# Altium PCB ControleSTM.PcbDoc (part 1 of 3)
Units mm, origin at the board's own origin, x right, y up, seen from the top; angles counter-clockwise.
Board outline 69.32 x 31.88 mm, 2 copper layers (Top Layer, Bottom Layer); 62 components, 48 nets, 242 pads, 79 vias.
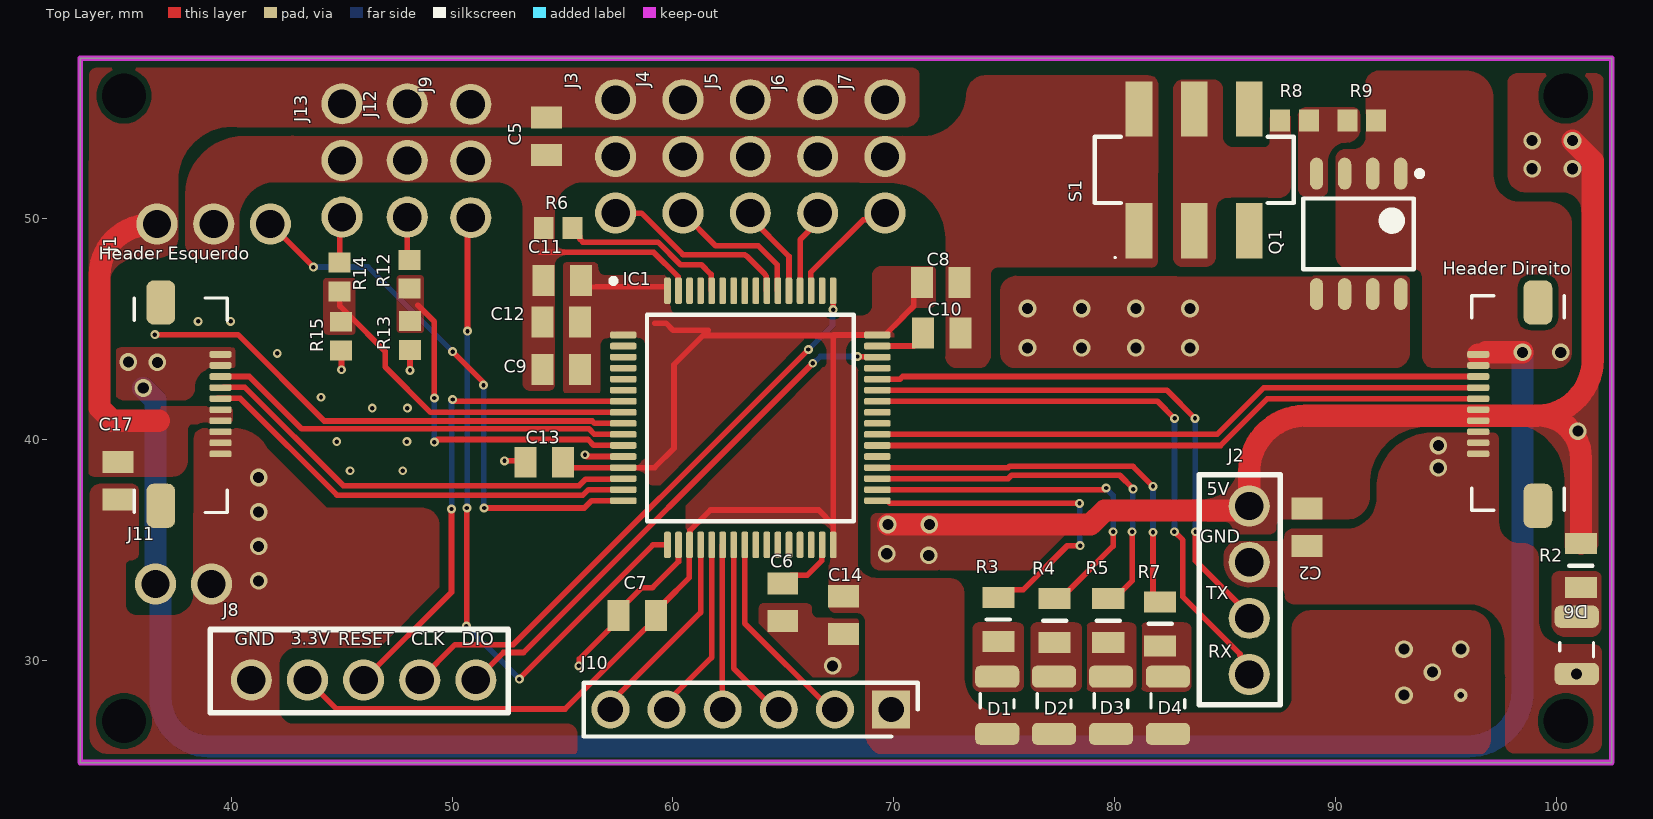
[diagram p0: Top Layer view]
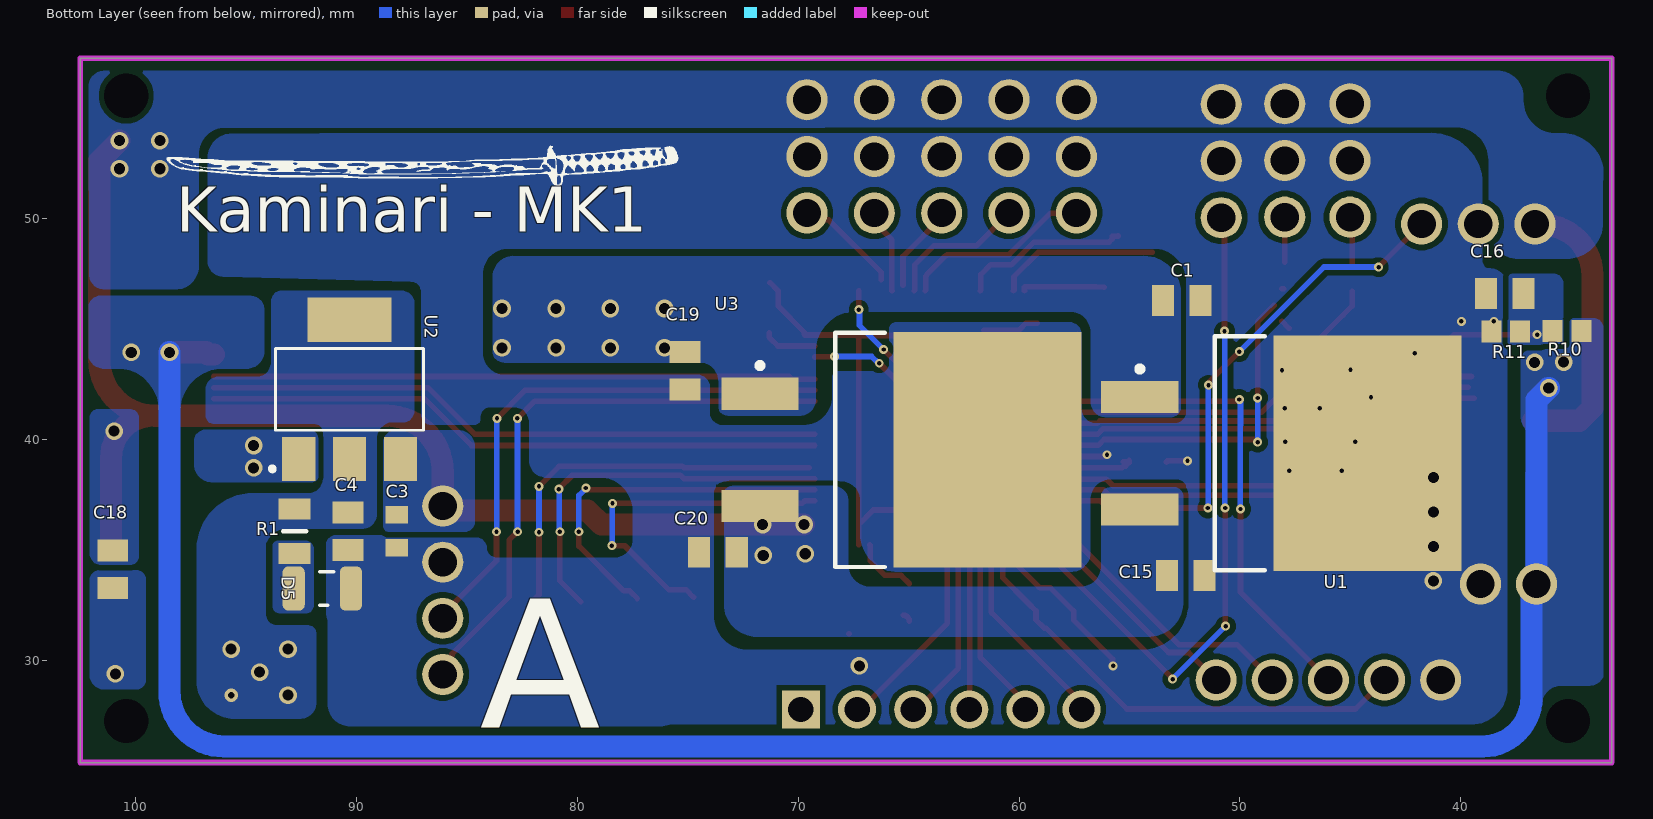
[diagram p1: Bottom Layer view, seen from below]
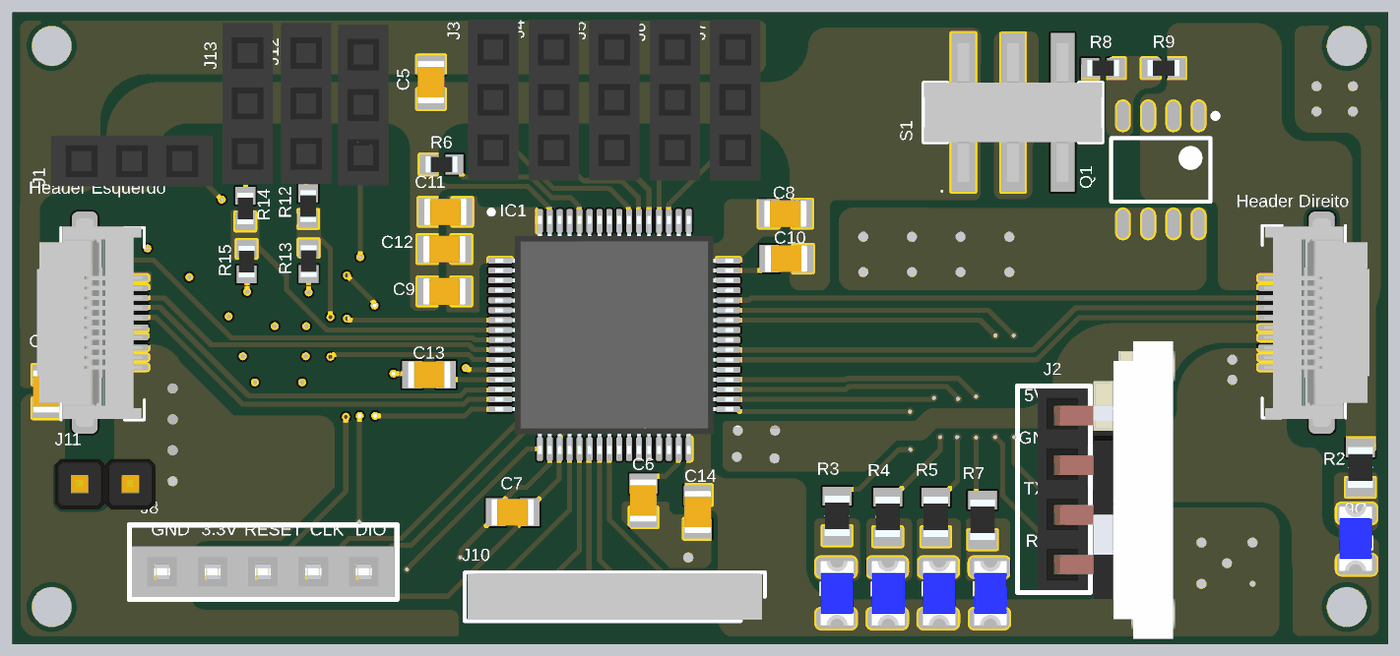
[diagram p3: 3D render of the assembled board from above, using the file's embedded part models]
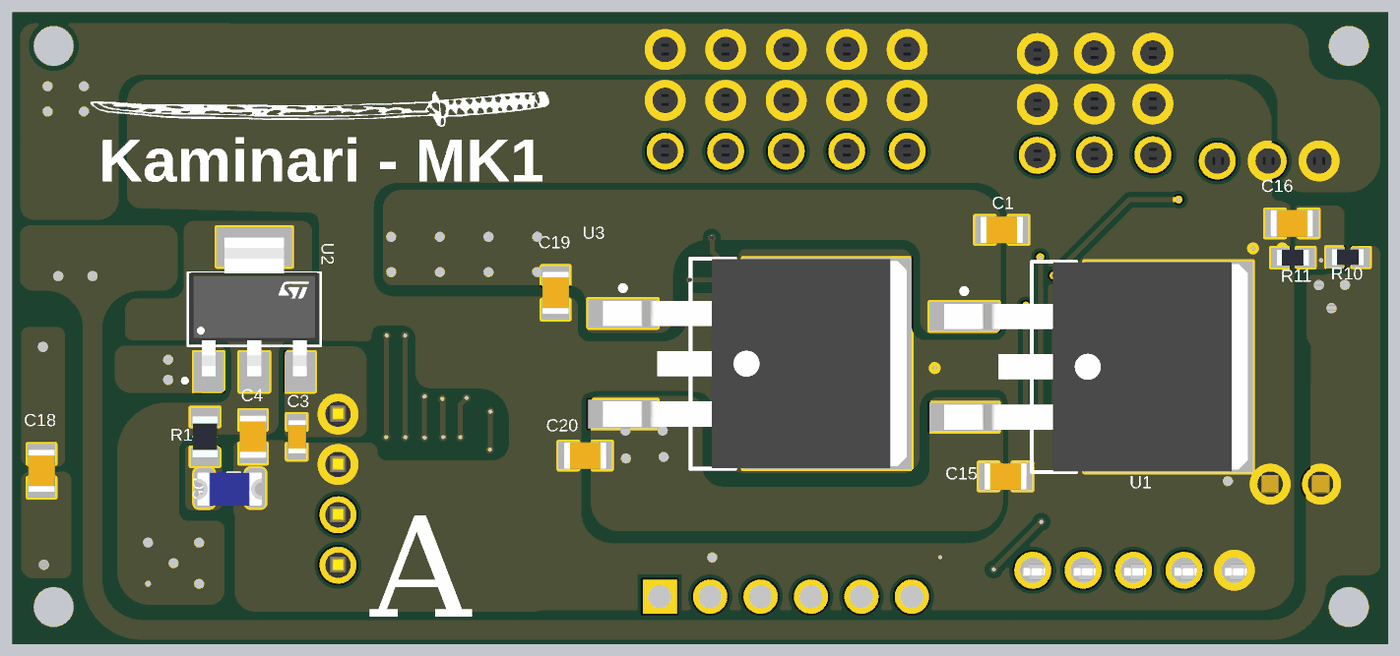
[diagram p4: 3D render of the assembled board from below, using the file's embedded part models]

## Layer stack, top to bottom
Top Solder: solder mask 0.0102, Solder Resist, Dk 3.5
Top Layer: signal copper 0.0356
Dielectric 1: dielectric 0.32, FR-4, Dk 4.8
Bottom Layer: signal copper 0.0356
Bottom Solder: solder mask 0.0102, Solder Resist, Dk 3.5

## Board outline
33.172,25.4 102.489,25.4 102.489,57.277 33.172,57.277

## Design rules (kind name [scope] priority, off if disabled: settings)
Clearance [All] p1: gap=0.254 ignorepadtopadclearanceinfootprint=TRUE except(0: Arc-Hole Track-Hole SMDPad-Hole THPad-Hole Via-Hole Fill-Hole Poly-Hole Region-Hole Text-Hole; 0.1: Arc-Arc Arc-Track Arc-SMDPad Track-Track Track-SMDPad SMDPad-SMDPad)
Height [All] p1: minheight=0 maxheight=1000 prefheight=0
PolygonConnect [All] p1: connectstyle=Direct reliefconductorwidth=0.254 reliefentries=4 polygonreliefangle="90 Angle" airgapwidth=0.254
RoutingVias [All] p1: holewidth=0.711 width=1.27 viastyle="Through Hole" minholewidth=0.711 minwidth=1.27 maxholewidth=0.711 maxwidth=1.27
SolderMaskExpansion [All] p1: expansion=0.102 istentingtop=FALSE
Width [All] p1: maxlimit=1 minlimit=0.254 preferedwidth=0.254 minimp=50.000000 maximp=50.000000 favimp=50.000000
29 further rules are at their usual default settings.

## Classes and differential pairs
component class FontesLineares: C1 C2 C3 C4 C19 C20 D5 D6 Q1 R1 R2 R8 R9 S1 U1 U2 U3
component class controleSTM: C5 C6 C7 C8 C9 C10 C11 C12 C13 C14 C15 C16 C17 C18 D1 D2 D3 D4 "Header Direito" "Header Esquerdo" IC1 J1 J2 J3 J4 J5 J6 J7 J8 J9 J10 J11 J12 J13 R3 R4 R5 R6 R7 R10 R11 R12 R13 R14 R15

## Components (designator, comment, footprint, x,y, rotation, side; value= is the part's Value field where it differs from the comment)
C1 "0.33 uF" C0805 52.641,46.296 r0 bottom
C2 "0.1uF" C0805 88.692,36.05 r90 top
C3 "1uF" C0603 88.181,35.878 r90 bottom
C4 "4.7 uF" C0805 90.373,35.865 r90 bottom
C5 "0.1uF" C0805 54.275,53.75 r270 top
C6 "2.2 uF" C0805 64.975,32.65 r270 top
C7 "0.1uF" C0805 58.381,32.066 r0 top
C8 "0.1uF" C0805 72.122,47.109 r180 top
C9 "4.7 uF" C0805 54.94,43.205 r0 top
C10 "2.2 uF" C0805 72.161,44.856 r0 top
C11 "0.1uF" C0805 54.991,47.219 r0 top
C12 "0.1uF" C0805 54.94,45.339 r0 top
C13 "0.1uF" C0805 54.175,39 r0 top
C14 "0.1uF" C0805 67.7,32.075 r90 top
C15 "0.1uF" C0805 52.451,33.858 r0 bottom
C16 "100 nF" C0805 38.024,46.634 r180 bottom
C17 "4.7 uF" C0805 34.9,38.15 r270 top
C18 "4.7 uF" C0805 101.025,34.15 r90 bottom
C19 "0.33 uF" C0805 75.125,43.125 r90 bottom
C20 "0.1uF" C0805 73.625,34.925 r180 bottom
D1 "Blue" DIODO_2-SMD-3215 74.675,28 r270 top
D2 "Blue" DIODO_2-SMD-3215 77.25,28 r270 top
D3 "Blue" DIODO_2-SMD-3215 79.825,28 r270 top
D4 "Blue" DIODO_2-SMD-3215 82.4,28 r270 top
D5 "Blue" DIODO_2-SMD-3215 91.525,33.275 r0 bottom
D6 "Blue" DIODO_2-SMD-3215 100.9,30.7 r90 top
"Header Direito" "505278-1033" FPC_CON 98.044,41.62 r90 top
"Header Esquerdo" "505278-1033" FPC_CON 37.922,41.62 r270 top
IC1 "STM32F405RGT6" LQFP-64 63.5,41 r0 top
J1 "Female Header 3" "FEMALE HEADER 3" 36.65,49.775 r0 top
J2 "Bluetooth" BLUETOOTH 86.081,37.008 r270 top
J3 "Female Header 3" "FEMALE HEADER 3" 57.404,55.397 r270 top
J4 "Female Header 3" "FEMALE HEADER 3" 60.452,55.397 r270 top
J5 "Female Header 3" "FEMALE HEADER 3" 63.5,55.397 r270 top
J6 "Female Header 3" "FEMALE HEADER 3" 66.548,55.397 r270 top
J7 "Female Header 3" "FEMALE HEADER 3" 69.596,55.397 r270 top
J8 "STM Bootloader" "STM BOOTLOADER" 51.079,29.134 r180 top
J9 "Female Header 3" "FEMALE HEADER 3" 50.85,50.06 r90 top
J10 "Male Header 6" "MALE HEADER 6" 69.87,27.8 r180 top
J11 "Male Header 2" "MALE HEADER 2" 36.576,33.477 r0 top
J12 "Female Header 3" "FEMALE HEADER 3" 47.975,55.215 r270 top
J13 "Female Header 3" "FEMALE HEADER 3" 45.025,55.215 r270 top
Q1 "FDS6576" SOIC-8 91.034,49.327 r270 top
R1 "100R" RESISTOR_0805 92.786,35.865 r90 bottom
R2 "470R" RESISTOR_0805 101.092,34.315 r90 top
R3 "100R" RESISTOR_0805 74.725,31.875 r90 top
R4 "100R" RESISTOR_0805 77.275,31.825 r90 top
R5 "100R" RESISTOR_0805 79.7,31.825 r90 top
R6 "10kR" RESISTOR_0603 54.8,49.6 r180 top
R7 "100R" RESISTOR_0805 82.05,31.675 r90 top
R8 "10kR" RESISTOR_0603 88.128,54.458 r0 top
R9 "10kR" RESISTOR_0603 91.176,54.458 r180 top
R10 "10kR" RESISTOR_0603 35.2,44.925 r180 bottom
R11 "3.3kR" RESISTOR_0603 37.975,44.9 r180 bottom
R12 "10 kOhm" RESISTOR_0603 48.075,47.5 r90 top
R13 "20 kOhm" RESISTOR_0603 48.1,44.725 r90 top
R14 "10 kOhm" RESISTOR_0603 44.912,47.375 r90 top
R15 "20 kOhm" RESISTOR_0603 44.975,44.7 r90 top
S1 "JS202011SCQN" DPDT 83.591,52.222 r0 top
U1 "L7805CD2T-TR" D2PAK 48.133,39.395 r180 bottom
U2 "LDL1117S33R" SOT-223-4 90.297,42.291 r180 bottom
U3 "L7805CD2T-TR" D2PAK 65.325,39.55 r180 bottom

## Footprints (in the part's own frame and the unit in brackets; to place one, negate y for a bottom-side part, rotate by r counter-clockwise, add the part's x,y. Pads: shape width x height; smd on the part's side, far side on the other; paste and mask are expansions set on the pad)
BLUETOOTH [mm]
  round 1.86 hole 1.28: GND(2.54,0) RX(7.62,0) TX(5.08,0) VCC(0,0)
  silkscreen extent -1.42,-2.26 8.99,1.4, body extent -3.67,-1.26 11.33,5.67, height 46
C0603 [mm]
  rect 0.8x1 smd: 1(-0.763,-0.018) 2(0.737,-0.018)
  body extent -0.86,-0.49 0.84,0.41, height 0.8
C0805 [mm]
  rect 1x1.4 smd: 1(-0.85,-0.008) 2(0.85,-0.008)
  body extent -1.07,-0.68 1.07,0.67, height 0.9
D2PAK [mm] "D2-PAK, 3-Pads, Body 7,60x8,64mm (max), IPC Medium Density"
  rect 3.5x1.45 smd: 1(-6.4,2.54) 3(-6.4,-2.54)
  rect 8.5x10.65 smd: 2(3.9,0)
  silkscreen extent -6.53,-5.3 -0.75,5.3, body extent -7.41,-5.28 7.89,5.28, height 4.81
DIODO_2-SMD-3215 [mm]
  rrect50% 1x2 smd: A(1.3,0) C(-1.288,-0.001)
  silkscreen extent -0.51,-0.76 0.13,0.76, body extent -1.61,-0.77 1.66,0.87, height 0.9
DPDT [mm]
  rect 1.2x2.5 smd: A1(0,-2.75) A1(0,2.75) A2(-2.5,-2.75) A2(-2.5,2.75) A3(2.5,-2.75) A3(2.5,2.75)
  silkscreen extent -4.5,-4 4.5,1.5, body extent -4.5,-3.5 4.5,3.5, height 5.65
"FEMALE HEADER 3" [mm]
  round 1.86 hole 1.28: PIN1(0,0) PIN2(2.565,0) PIN3(5.13,0)
  body extent -1.52,-1.27 6.6,1.27, height 8.5
FPC_CON [mm] "Small Outline IC (SOIC), 1.27 mm pitch; 8 pin, 4.90 mm L X 3.90 mm W X 1.75 mm H body"
  rrect50% 0.3x1 smd: 1(-2.25,1.6) 2(-1.75,1.6) 3(-1.25,1.6) 4(-0.75,1.6) 5(-0.25,1.6) 6(0.25,1.6) 7(0.75,1.6) 8(1.25,1.6) 9(1.75,1.6) 10(2.25,1.6)
  rrect50% 2x1.3 smd: MP1(-4.6,-1.1) MP2(4.6,-1.1)
  silkscreen extent -4.8,-2.3 4.9,1.9, body extent -5.25,-3.5 5.25,1.8, height 1.88
LQFP-64 [mm]
  rrect50% 1.2x0.3 smd: 1(-5.75,3.75) 2(-5.75,3.25) 3(-5.75,2.75) 4(-5.75,2.25) 5(-5.75,1.75) 6(-5.75,1.25) 7(-5.75,0.75) 8(-5.75,0.25) 9(-5.75,-0.25) 10(-5.75,-0.75) 11(-5.75,-1.25) 12(-5.75,-1.75) 13(-5.75,-2.25) 14(-5.75,-2.75) 15(-5.75,-3.25) 16(-5.75,-3.75) 33(5.75,-3.75) 34(5.75,-3.25) 35(5.75,-2.75) 36(5.75,-2.25) 37(5.75,-1.75) 38(5.75,-1.25) 39(5.75,-0.75) 40(5.75,-0.25) 41(5.75,0.25) 42(5.75,0.75) 43(5.75,1.25) 44(5.75,1.75) 45(5.75,2.25) 46(5.75,2.75) 47(5.75,3.25) 48(5.75,3.75)
  rrect50% 0.3x1.2 smd: 17(-3.75,-5.75) 18(-3.25,-5.75) 19(-2.75,-5.75) 20(-2.25,-5.75) 21(-1.75,-5.75) 22(-1.25,-5.75) 23(-0.75,-5.75) 24(-0.25,-5.75) 25(0.25,-5.75) 26(0.75,-5.75) 27(1.25,-5.75) 28(1.75,-5.75) 29(2.25,-5.75) 30(2.75,-5.75) 31(3.25,-5.75) 32(3.75,-5.75) 49(3.75,5.75) 50(3.25,5.75) 51(2.75,5.75) 52(2.25,5.75) 53(1.75,5.75) 54(1.25,5.75) 55(0.75,5.75) 56(0.25,5.75) 57(-0.25,5.75) 58(-0.75,5.75) 59(-1.25,5.75) 60(-1.75,5.75) 61(-2.25,5.75) 62(-2.75,5.75) 63(-3.25,5.75) 64(-3.75,5.75)
  silkscreen extent -6.3,-4.68 4.68,6.3, body extent -6,-6 6,6, height 1.6
"MALE HEADER 2" [mm]
  round 1.86 hole 1.28: PIN1(0,0) PIN2(2.54,0)
  body extent -1.27,-1.27 3.81,1.27, height 8
"MALE HEADER 6" [mm]
  rect 1.725x1.725 hole 1.15: PIN1(0,0)
  round 1.725 hole 1.15: PIN2(2.54,0) PIN3(5.08,0) PIN4(7.62,0) PIN5(10.16,0) PIN6(12.7,0)
  silkscreen extent -1.21,-1.22 13.91,1.22, body extent -1.07,-1.17 13.77,1.17, height 10.37
RESISTOR_0603 [mm]
  rect 0.9x1 smd: 1(-0.65,0) 2(0.65,0)
  body extent -0.8,-0.4 0.8,0.4, height 0.55
RESISTOR_0805 [mm]
  rect 0.95x1.45 smd: 1(-1,0) 2(1,0)
  silkscreen extent 0,-0.53 0,0.53, body extent -1.02,-0.63 1.02,0.63, height 0.5
SOIC-8 [mm] "SOIC, 8-Leads, Body 4,90x3,90mm, Pitch 1,27mm, IPC Medium Density"
  oval 1.45x0.6 smd: D(2.725,1.905) D(2.725,-0.635) D(2.725,0.635) D(2.725,-1.905) G(-2.725,-1.905) S(-2.725,1.905) S(-2.725,-0.635) S(-2.725,0.635)
  silkscreen extent -2.85,-2.5 1.6,2.88, body extent -2,-2.5 2,2.5, height 1.75
SOT-223-4 [mm]
  rect 1.5x2 smd: 1(-2.3,-3.15) 2(0,-3.15) 3(2.3,-3.15)
  rect 3.8x2 smd: 2(0,3.15)
  silkscreen extent -3.6,-3.7 3.35,1.85, body extent -3.25,-3.38 3.25,3.62, height 1.9
"STM BOOTLOADER" [mm]
  round 1.86 hole 1.28: CLK(2.54,0) DIO(0,0) GND(10.16,0) RESET(5.08,0) VCC(7.62,0)
  silkscreen extent -1.47,-2.29 12.01,1.47, body extent -1.32,-1.19 11.88,1.35, height 8.5

## Part data
C1 C19: library part GCM21BR71E334KA37K, "CAP CER 0.33UF 25V X7R 0805", Manufacturer="Murata Eletronics", Operating Temperature="-55 C ~ 125 C", Package / Case="0805 (2012 Metric)", Supplier Part Number 1=81-GCM21BR71E334KA7K, Tolerance=10%, Voltage - Rated="25 VDC", Category="Ceramic Capacitor", ComponentLink1Description=Datasheet, ComponentLink1URL=https://br.mouser.com/datasheet/2/281/GCM21BR71E334KA37_01-1968656.pdf, ComponentLink2Description="Mouser Link", ComponentLink2URL=https://br.mouser.com/ProductDetail/Murata-Electronics/GCM21BR71E334KA37K?qs=N3Kl9KD794Tg%2FXM5q2uFQQ%3D%3D, ComponentLink3Description=ESR, ComponentLink3URL=https://www.murata.com/en-us/products/productdetail?partno=GCM21BR71E334KA37%23, Dieletric=X7R, Library Control - Checked Footprint=Yes, Library Control - Checked Schematic=Yes, Library Control - Last Update="28/06/2021 00:57", Library Control - Person that Checked Footprint=Nikaum, Library Control - Person that Checked Schematic=Nikaum, Library Control - Person that did the Last Update Footprint=Nikaum, Library Control - Person that did the Last Update Schematic=Nikaum, Library Ref=Capacitor, Part Number=GCM21BR71E334KA37K, Price="1= 0,57, 10= 0,398, 100= 0,239 (USD)", Size / Dimension="2,00 L x 1,25 W x 1,25 H", Supplier 1=Mouser
C2 C5 C7 C8 C11 C12 C13 C14 C15 C20: library part C0805C104M3RACTU, "CAP CER 0.1uF 25V X7R 0805", Manufacturer=Kemet, Operating Temperature="-55 C ~ 125 C", Package / Case="0805(2012 mestric)", Supplier Part Number 1=80-C0805C104M3R, Tolerance=20%, Voltage - Rated="25 VDC", Category="Ceramic Capacitor", ComponentLink1Description=Datasheet, ComponentLink1URL=https://br.mouser.com/datasheet/2/212/KEM_C1002_X7R_SMD-1102033.pdf, ComponentLink2Description="Mouser Link", ComponentLink2URL=https://br.mouser.com/ProductDetail/KEMET/C0805C104M3RACTU?qs=jbCUrP3sAgSIdMuvv9W4Pg%3D%3D, Dieletric=X7R, ESR=-, Library Control - Checked Footprint=No, Library Control - Checked Schematic=Yes, Library Control - Last Update="26/06/2021 20:52", Library Control - Person that Checked Schematic=Guilherme, Library Control - Person that did the Last Update Schematic=Marcos, Library Ref=Capacitor, Part Number=C0805C104M3RACTU, Price="1=0,13 10=0,064 100=0,037 1000=0,025 (USD)", Size / Dimension="1.25 mm W x 2 mm L x 0.78 mm H", Supplier 1=Mouser
C3: library part "Capacitor Model", "CAP CER 1UF 25V X7R 0603", ComponentLink1Description="Mouser Link", ComponentLink2Description=Datasheet
C4 C9 C17 C18: library part GRM219R61E475KA73D, "CAP CER 4.7uF 25V X5R 0805", Manufacturer="MURATA ELECTRONICS", Operating Temperature="-55°C ~ 85°C", Package / Case="0805(2012 metric)", Supplier Part Number 1=81-GRM219R61E475KA73D, Tolerance=10%, Voltage - Rated="25 VDC", Category="Ceramic Capacitors", ComponentLink1Description=Datasheet, ComponentLink1URL=https://br.mouser.com/datasheet/2/281/1/GRM219R61E475KA73_01A-1986363.pdf, ComponentLink2Description="Mouser Link", ComponentLink2URL=https://br.mouser.com/ProductDetail/Murata-Electronics/GRM219R61E475KA73D?qs=%2Fha2pyFadui1540apPxqrcvNL2Od6%2FE9q78FE8iyERiL9ZO4NhnlONCgyc%2FC2rEQ, Dieletric=X5R, ESR=-, Library Control - Checked Footprint=Yes, Library Control - Checked Schematic=Yes, Library Control - Last Update=25/08/22, Library Control - Person that Checked Footprint=Cage, Library Control - Person that Checked Schematic=Cage, Library Control - Person that did the Last Update Footprint=Cage, Library Control - Person that did the Last Update Schematic=Cage, Library Ref=Capacitor, Part Number=GRM219R61E475KA73D, Price="1=0,28 10=0,193 100=0,098 1000=0,059 (USD)", Size / Dimension="2 mm L x 1.25 mm W x 0.85 mm H", Supplier 1=Mouser
C6 C10: library part GCM21BR71C225KA64L, "CAP CER 2.2uF 16V X7R 0805", Manufacturer="MURATA ELECTRONICS", Operating Temperature="-55°C ~125ºC", Package / Case="0805(2012 Metric)", Supplier Part Number 1=81-GCM21BR71C225KA4L, Tolerance=10%, Voltage - Rated="16 VDC", Category="Ceramic capacitor", ComponentLink1Description=Datasheet, ComponentLink1URL=https://br.mouser.com/ProductDetail/Murata-Electronics/GCM21BR71C225KA64L?qs=aEuGZpxfbxV0E5XH%252BwYupA%3D%3D, ComponentLink2Description="Mouser Link", ComponentLink2URL=https://br.mouser.com/ProductDetail/Murata-Electronics/GCM21BR71C225KA64L?qs=aEuGZpxfbxV0E5XH%252BwYupA%3D%3D, Dieletric=X7R, ESR=-, Library Control - Checked Footprint=Yes, Library Control - Checked Schematic=Yes, Library Control - Last Update=25/08/22, Library Control - Person that Checked Footprint=Cage, Library Control - Person that Checked Schematic=Cage, Library Control - Person that did the Last Update Footprint=Cage, Library Control - Person that did the Last Update Schematic=Cage, Library Ref=Capacitor, Part Number=GCM21BR71C225KA64L, Price="1=0,41 10=0,283 100=0,169 1000=0,107 (USD)", Size / Dimension="2 mm L  x 1.25 mm W x 1.25 mm H", Supplier 1=Mouser
C16: library part 885012207128, "CAP CER 100 nF 100V X7R 0805", Manufacturer="Wurth Elektronik", Operating Temperature="-55°C ~125ºC", Package / Case="0805(2012 Metric)", Supplier Part Number 1=710-885012207128, Tolerance=10%, Voltage - Rated="100 VDC", Category="Ceramic capacitor", ComponentLink1Description=Datasheet, ComponentLink1URL=https://br.mouser.com/datasheet/2/445/885012207128-1727772.pdf, ComponentLink2Description="Mouser Link", ComponentLink2URL=https://br.mouser.com/ProductDetail/Wurth-Elektronik/885012207128?qs=MLItCLRbWsys1TnbPEYt%252BQ%3D%3D, Dieletric=X7R, ESR=-, Library Control - Checked Footprint=Yes, Library Control - Checked Schematic=Yes, Library Ref=Capacitor, Part Number=885012207128, Price="1=0,41 10=0,283 100=0,169 1000=0,107 (USD)", Size / Dimension="2 mm L  x 1.25 mm W x 1.25 mm H", Supplier 1=Mouser
D1 D2 D3 D4 D5 D6: library part EAST3215BA5, "LED 75mW BLUE 45MCD 3215", Current - Forward (If)="20 mA", Manufacturer="Everlight Electronics", Max Power Dissipation="75 mW", Operating Temperature="- 40 °C ~ 85 °C", Package / Case=3215, Reverse Voltage="5 V", Supplier Part Number 1=638-EAST3215BA5, Voltage - Forward (Vf)="3,30 V", Category="Standard LEDs - SMD", Color=Blue, ComponentLink1Description="Mouser Link", ComponentLink1URL=https://www.mouser.com/ProductDetail/Everlight/EAST3215BA5?qs=Cqqh%252BS766wnzp9nQVj5A4g==, ComponentLink2Description=Datasheet, ComponentLink2URL=https://www.mouser.com/datasheet/2/143/EAST3215BA5-1154292.pdf, Library Control - Checked Footprint=yes, Library Control - Checked Schematic=yes, Library Control - Last Update="13/06/2021 12:45", Library Control - Person that Checked Footprint=Lucas, Library Control - Person that Checked Schematic=Lucas, Library Control - Person that did the Last Update Footprint="Stéfany (Ster)", Library Control - Person that did the Last Update Schematic="Stéfany (Ster)", Library Ref=Diodo/Led, Luminous Intensity="45 mcd", Max Current Rating="20 mA", Part Number=EAST3215BA5, Price="1 = 0,3800, 10 = 0,2050, 100 = 0.1080 (USD)", Supplier 1=Mouser, Viewing Angle=130°, Wavelength="468 nm"
"Header Direito" "Header Esquerdo": library part 505278-1033_BODY, "CONN FFC/FPC HORZ 10POS 0.50MM", Current Rating (Amps)=500mA, Manufacturer=Molex, Operating Temperature="-40°C ~ 85°C", Supplier Part Number 1=538-505278-1033, Category=Connectors, ComponentLink1Description=Datasheet, ComponentLink1URL=https://br.mouser.com/datasheet/2/276/2/5052781033_FFC_FPC_CONNECTORS-772019.pdf, ComponentLink2Description="Mouser Link", ComponentLink2URL=https://br.mouser.com/ProductDetail/Molex/505278-1033?qs=c8NFF48pVsDStgrQCBOSTg%3D%3D, Contact Length - Mating=0.50mm, Contact Material=Tin, Contact Type=FFC/FPC, Insulation Material="Liquid Crystal Polymer", Library Control - Checked Footprint=Yes, Library Control - Checked Schematic=Yes, Library Control - Last Project that Used=Follow-Final, Library Control - Last Update="24/04/2021 00:25", Library Control - Person that Checked Footprint=Lucas, Library Control - Person that Checked Schematic=Lucas, Library Control - Person that did the Last Update Footprint=Mateus(Dimas), Library Control - Person that did the Last Update Schematic=Mateus(Dimas), Library Ref=Connectors, Mounting Type="Right Angle", Number of Positions=10, Number of Rows=1, Part Number=505278-1033, Pitch=0.50mm, Price="1=0,51000, 10=0,42900, 100=0,33400 (USD)", Supplier 1=Mouser, Termination=SMD
IC1: "IC MCU 32-BIT 192kB FLASH ARM Cortex-M4 168MHz  LQFP-64", Manufacturer=STM, Operating Temperature="-40°C to 85°C", Package/Case=LQFP-64, Supplier Part Number 1=511-STM32F405RGT6, Voltage - Supply (Vcc/Vdd)="1.8 V to 3.6 V", Category="ARM Microcontrollers - MCU", ComponentLink1Description="Mouser Link", ComponentLink1URL=https://www.mouser.com/ProductDetail/STMicroelectronics/STM32F405RGT6?qs=Z8%252BeY1k3TIKgj7QWsYGpQw%3D%3D, ComponentLink2Description="Datasheet Link", ComponentLink2URL=https://www.mouser.com/datasheet/2/389/dm00037051-1797298.pdf, Connectivity=-, Core Processor="ARM Cortex M0+", Library Control - Last Update="22/08/21 15:09", Library Control - Person that did the Last Update Footprint=Marcos, Library Control - Person that did the Last Update Schematic=Marcos, Library Ref=Microcrontrollers, Number of ADC Channels=16, Number of Ethernet Channels=-, Number of I2C Channels=3, Number of I/Os=51, Number of SPI Channels=3, Number of Timers/Counters=17, Number of UART/USART Channels=4, Oscillator Type=Internal, Part Number=STM32F405RGT6, Peripherals="CAN, I2C, SDIO, I2S / SPI, UART / USART, USB", Price="1 = 12,95, 10 = 11,91,  100 = 11,42, 500 = 8,95 (USD)", Program Memory Size=1024kB, Program Memory Type=Flash, RAM Size="192k B", Series=STM32F405RG, Speed=168MHz, Supplier 1=Mouser
J2: library part "Barramento Bluetooth", "BARRAMENTO BLUETOOTH HC-06", Frequency="2,4 GHz", Operating Voltage="3,6 / 6 (V)", Recomended Operating Configuration="5V @ 50mA", Bluetooth Mode="Slave Only", Library Ref=Header, Max Range=10m, Maximum Serial Transmission Rate="9600 bps", Modulation="GFSK (Gaussian Frequency Shift Keying)", Number of Contacts=4
J8: library part "Barramento de Gravação STM", "BARRAMENTO DE GRAVAÇÃO", Library Ref=Header, Number of Contacts=5
Q1: "MOSFET P-CH 20V 11A SOIC-8", Current - Continuous Drain (Id) @25°C=-11A, Drain to Source Voltage (Vds)=-20V, Drive Voltage (Max Rds On, Min Rds On)="-2.5V ~4.5V", Input Capacitance (Ciss) (Max) @Vds=4044pF@-10V, Manufacturer="onsemi / Fairchild", Operating Temperature="-55 °C ~150 °C", Package / Case=SOIC-8, Power Dissipation (Max)=2.5W, Supplier Part Number 1=512-FDS6576, ComponentLink1Description=Datasheet, ComponentLink1URL=https://br.mouser.com/datasheet/2/308/1/FDS6576_D-1808687.pdf, ComponentLink2Description=Mouser, ComponentLink2URL=https://br.mouser.com/ProductDetail/onsemi-Fairchild/FDS6576?qs=FOlmdCx%252BAA1N14vq5QZP7Q%3D%3D, FET Type=P-Channel, Gate Charge (Qg) (Max) @ Vgs=60nC@-4.5V, Library Ref=Mosfet, Part Number=SOIC-8, Price="1=1.34, 10=1.20, 100=0.932, 500=0.77, 1000=0.608 (USD)", Rds On (Max) @ Id, Vgs="23mOhms @ -11A, -4.5V", Rise / Fall Time (Typ)="17 / 79 (ns)", Supplier 1=Mouser, Vgs (Max)=12V, Vgs(th) (Max) Id=-1.5V@-250uA
R1 R3 R4 R5 R7: library part CRCW0805100RFKEA, "RES SMD 100 OHM 1% 1/8W 0805", Manufacturer="Vishay / Dale", Operating Temperature="- 55ºC ~ 155ºC", Package / Case="0805 (2012 Metric)", Power Rating="125 mW (1/8 W)", Resistor Type=Fixo, Supplier Part Number 1=71-CRCW0805-100-E3, Temperature Coefficient="100 PPM / C", Tolerance="1 %", Voltage Rating="150 V", Category="Thick Film Resistors - SMD", ComponentLink1Description="Mouser Link", ComponentLink1URL=https://www.mouser.com/ProductDetail/Vishay-Dale/CRCW0805100RFKEA?qs=sGAEpiMZZMu61qfTUdNhG2DpbjADlD3GxPcNG3UnvYk%3D, ComponentLink2Description="Datasheet Link", ComponentLink2URL=https://www.mouser.com/datasheet/2/427/dcrcwe3-1762152.pdf, Library Control - Checked Footprint=No, Library Control - Checked Schematic=Yes, Library Control - Last Update="20/06/21 16:56", Library Control - Person that Checked Schematic=Marcos, Library Control - Person that did the Last Update Footprint=Dalarme, Library Control - Person that did the Last Update Schematic=Marcos, Library Ref=Resistor, Part Number=CRCW0805100RFKEA, Price="1=0,18, 10=0,065, 100=0,027, 1000=0,012 (USD)", Size / Dimension="2 mm L x  1.25 mm W x  0.45 mm H", Supplier 1=Mouser
R2: library part ERJ-6GEYJ471V, "RES SMD 470 OHM 5% 1/8W 0805", Manufacturer=Panasonic, Operating Temperature="- 55ºC ~ 155ºC", Package / Case="0805 (2012 Metric)", Part Number=667-ERJ-6GEYJ471V, Power Rating="125 mW (1/8 W)", Resistor Type=Fixo, Temperature Coefficient="200 PPM / C", Tolerance="5 %", Voltage Rating="150 V", Category="Thick Film Resistors - SMD", ComponentLink1Description="Datasheet Link", ComponentLink1URL=https://br.mouser.com/datasheet/2/315/AOA0000C301-1488782.pdf, ComponentLink2Description="Mouser Link", ComponentLink2URL=https://www.mouser.com/ProductDetail/Panasonic/ERJ-6GEYJ471V?qs=%2Fha2pyFadujWqMGonbcVXQOcxwQBA8OuqUzw3XmrY6vv5LW7wYDrug%3D%3D, Library Control - Checked Footprint=No, Library Control - Checked Schematic=Yes, Library Control - Last Update="20/06/21 16:06", Library Control - Person that Checked Schematic=Marcos, Library Control - Person that did the Last Update Footprint=Dalarme, Library Control - Person that did the Last Update Schematic=Marcos, Library Ref=Resistor, Price="1=0,1000, 10=0,04300, 100=0,02000 1000 = 0,009(USD)", Size / Dimension="2 mm L x  1.25 mm W x  0.6 mm H", Supplier 1=Mouser, Supplier Part Number 1=667-ERJ-6GEYJ471V
R6 R8 R9 R10: library part RC0603JR-0710KL, "RES SMD 10K OHM 5% 1/10W 0603", Manufacturer=Yageo, Operating Temperature="- 55ºC ~ 155ºC", Package / Case="0603 (1608 Metric)", Power Rating="100 mW (1/10 W)", Resistor Type=Fixo, Supplier Part Number 1=603-RC0603JR-0710KL, Temperature Coefficient="100 PPM / C", Tolerance="5 %", Voltage Rating="75 V", Category="Thick Film Resistors - SMD", ComponentLink1Description="Mouser Link", ComponentLink1URL=https://br.mouser.com/ProductDetail/Yageo/RC0603JR-0710KL?qs=ksOUTF%2FWcd8D6T22BJkQ7g%3D%3D, ComponentLink2Description="Datsheet Link", ComponentLink2URL=https://br.mouser.com/datasheet/2/447/Yageo_03_18_2021_PYu_RC_Group_51_RoHS_L_11-2199992.pdf, Library Control - Checked Footprint=No, Library Control - Checked Schematic=Yes, Library Control - Last Update="21/06/21 14:15", Library Control - Person that Checked Schematic=Marcos, Library Control - Person that did the Last Update Footprint=Dalarme, Library Control - Person that did the Last Update Schematic=Marcos, Library Ref=Resistor, Part Number=RC0603JR-0710KL, Price="1=0,10, 10=0,015, 100=0,005 1000=0,0040 (USD)", Size / Dimension="1.6 mm L x  0.8 mm W x  0.45 mm H", Supplier 1=Mouser
R11: library part CRGCQ0603F3K3, "RES SMD 3.3K OHM 1% 1/10W 0603", Manufacturer="TE Connectivity / Holsworthy", Operating Temperature="- 55ºC ~ 125ºC", Package / Case="0603 (1608 Metric)", Power Rating="100 mW (1/10 W)", Resistor Type=Fixed, Supplier Part Number 1=279-CRGCQ0603F3K3, Temperature Coefficient="100 PPM / C", Tolerance="1 %", Voltage Rating="75 V", Category="Thick Film Resistors", ComponentLink1Description="Mouser Link", ComponentLink1URL=https://br.mouser.com/ProductDetail/TE-Connectivity-Holsworthy/CRGCQ0603F3K3?qs=sGAEpiMZZMvdGkrng054t7z4BkURc4Lz7mzhBruKq8fwVJ16OlxZFQ%3D%3D, ComponentLink2Description=Datasheet, ComponentLink2URL=https://br.mouser.com/datasheet/2/418/4/NG_DS_1773204-3_1-1358553.pdf, Library Control - Checked Footprint=Yes, Library Control - Checked Schematic=Yes, Library Control - Last Update="27/06/2021 20:27", Library Control - Person that Checked Footprint=Nikaum, Library Control - Person that Checked Schematic=Guilherme, Library Control - Person that did the Last Update Footprint=Dalarme, Library Control - Person that did the Last Update Schematic=Dalarme, Library Ref=Resistor, Part Number=CRGCQ0603F3K3, Price="1=0,10, 10=0,029, 100=0,011 (USD)", Size / Dimension="1.6 mm L x  0.8 mm W x  0.45 mm H", Supplier 1=Mouser
R12 R14: library part CRCW060310K0FKEBC, "RES SMD 10 kOHM 1% 1/10W 0603", Manufacturer=Vishay, Operating Temperature="- 55 C~155 C", Package / Case="0603 (1608 metric)", Power Rating="100mW (1/10 W)", Resistor Type=Fixo, Supplier Part Number 1=71-CRCW060310K0FKEBC, Temperature Coefficient="100 PPM / C", Tolerance="1 %", Voltage Rating="75 V", Category="Thick Film Resistors - SMD", ComponentLink1Description="Mouser Link", ComponentLink1URL=https://br.mouser.com/ProductDetail/Vishay-Dale/CRCW060310K0FKEBC?qs=wd5RIQLrsJiqANp9xmDb7A%3D%3D, ComponentLink2Description="Datasheet Link", ComponentLink2URL=https://br.mouser.com/datasheet/2/427/crcwce3-1762584.pdf, Library Ref=Resistor, Part Number=CRCW060310K0FKEBC, Price="1 = 0,10, 10 = 0,032, 100 = 0,013 (USD)", Size / Dimension="1,60 L x 0,80 W x 0,45 H", Supplier 1=Mouser
R13 R15: library part ERJ-3GEYJ203V, "RES SMD 20 kOHM 1% 1/10W 0603", Manufacturer=Panasonic, Operating Temperature="- 55 C~155 C", Package / Case="0603 (1608 metric)", Power Rating="100mW (1/10 W)", Resistor Type=Fixo, Supplier Part Number 1=667-ERJ-3GEYJ203V, Temperature Coefficient="100 PPM / C", Tolerance="5 %", Voltage Rating="75 V", Category="Thick Film Resistors - SMD", ComponentLink1Description="Mouser Link", ComponentLink1URL=https://br.mouser.com/ProductDetail/Panasonic/ERJ-3GEYJ203V?qs=4WZYzuGhm5oR10lJ%252BqFZyQ%3D%3D, ComponentLink2Description="Datasheet Link", ComponentLink2URL=https://br.mouser.com/datasheet/2/315/AOA0000C301-1488782.pdf, Library Ref=Resistor, Part Number=ERJ-3GEYJ203V, Price="1 = 0,10, 10 = 0,032, 100 = 0,013 (USD)", Size / Dimension="1,60 L x 0,80 W x 0,45 H", Supplier 1=Mouser
S1: "DEEP SWITCH 4 POSITIONS", Current Rating="300 mA", Manufacturer=C&K, Mouser Part Number=611-JS202011SCQN, Operating Temperature(max - min)=-20~70°C, Voltage Rating DC="30 VDC", ComponentLink1Description="Mouser Link", ComponentLink1URL=https://br.mouser.com/ProductDetail/CK/JS202011SCQN?qs=LgMIjt8LuD95JYWxZ7NvZA%3D%3D, ComponentLink2Description="Datasheet Link", ComponentLink2URL=https://www.mouser.com/datasheet/2/60/js-1841892.pdf, Library Control - Checked Footprint=Yes, Library Control - Checked Schematic=Yes, Library Control - Last Update=15/06/2021, Library Control - Person that Checked Footprint=Nikaum, Library Control - Person that Checked Schematic=Nikaum, Library Control - Person that did the Last Update Footprint=Nikaum, Library Control - Person that did the Last Update Schematic=Nikaum, Library Ref=Diversos, Part Number=JS202011SCQN, Supplier=Mouser, Switch Function="ON - ON"
U1 U3: "IC REG LINEAR 5V 1A D2PAK", Current - Output=1A, Current - Quiescent (Iq)=8mA, Manufacturer=ST, Max Power Dissipation="Internally Limited", Operating Temperature="-40~125 ºC", Package/ Case=D2PAK, Supplier Part Number 1=511-L7805CD2T-TR, Voltage - Dropout (Max)=2V, Voltage - Input (Max)=35V, Voltage - Output (Max)=5.25V, Voltage - Output (Min/Fixed)=5V, Category="Linear Voltage Regulator", ComponentLink1Description="Mouser Link", ComponentLink1URL=https://br.mouser.com/ProductDetail/STMicroelectronics/L7805CD2T-TR?qs=%2Fha2pyFadujE9KQ1BxQHaLKqcK8XYkwQA8UfL%2FIGb8dfQq%2Fq%2FT%2Fjqg%3D%3D, ComponentLink2Description=Datasheet, ComponentLink2URL=https://br.mouser.com/datasheet/2/389/cd00000444-1795274.pdf, Library Control - Checked Footprint=Yes, Library Control - Checked Schematic=Yes, Library Control - Last Update=25/06/21, Library Control - Person that Checked Footprint=Nícolas, Library Control - Person that Checked Schematic=Nícolas, Library Control - Person that did the Last Update Schematic=Nícolas, Library Ref="Voltage Regulator", Number of Regulators=1, Output Type=Fixed, Part Number=L7805CD2T-TR, Power Dissipation="Internally Limited", Price="1=0,93, 10=0,83, 100=0,79 (USD)", Supplier 1=Mouser
U2: "IC REG LINEAR 3.3V 1.2A SOT-223-4", Current - Output="1.2 A", Current - Quiescent (Iq)="250 uA", Manufacturer=STMicroelectronics, Max Power Dissipation="Internally limited", Operating Temperature=-40°C~125°C, Package/ Case=SOT-223-4, Supplier Part Number 1=511-LDL1117S33R, Voltage - Dropout (Max)="600mV (1.2 A)", Voltage - Input (Max)=18V, Voltage - Output (Max)=3.6V, Voltage - Output (Min/Fixed)="3.3 V", Category="Linear Voltage Regulator", ComponentLink1Description="Mouser Link", ComponentLink1URL=https://br.mouser.com/ProductDetail/STMicroelectronics/LDL1117S33R?qs=%2Fha2pyFadugA91l4ky%2FRZ5SN3GrMJ6YI2MUHTqmRDLfkBVrFdA%252BW6Q%3D%3D, ComponentLink2Description=Datasheet, ComponentLink2URL=https://br.mouser.com/datasheet/2/389/dm00366442-1799212.pdf, Library Control - Checked Footprint=Yes, Library Control - Checked Schematic=Yes, Library Control - Last Update="23/06/21 10:22", Library Control - Person that Checked Footprint=Nícolas, Library Control - Person that Checked Schematic=Nícolas, Library Control - Person that did the Last Update Footprint=Pierre, Library Control - Person that did the Last Update Schematic=Nícolas, Library Ref="Voltage Regulator", Number of Regulators=1, Output Type=Fixed, Part Number=LDL1117S33R, Power Dissipation="Internally limited", Price="1= 0.46000, 10= 0.34000, 100= 0.22900 (USD)", Supplier 1=Mouser
J1 J3 J4 J5 J6 J7 J9 J12 J13: Library Ref=Header, Number of Contacts=3, System=Connector
J10: Library Control - Checked Footprint=Yes, Library Control - Checked Schematic=Yes, Library Control - Last Update=02/10/2022, Library Control - Person that Checked Footprint=Cage, Library Control - Person that Checked Schematic=Cage, Library Control - Person that did the Last Update Schematic=Cage, Library Control - Persont that did the Last Update Footprint=Cage, Library Ref=Header, Number of Contacts=6, System=Connector
J11: Library Control - Person that did the Last Update Schematic=Marcos, Library Control - Persont that did the Last Update Footprint=Marcos, Library Ref=Header, Number of Contacts=2, System=Connector

## Free pads (board coordinates)
  round 1.524 hole 2: 2(35.154,27.28) 2(35.154,55.575) 2(100.406,27.28) 2(100.406,55.575)

## Via types
v1: diameter 0.8, hole 0.5, Top Layer to Bottom Layer, tented both sides, 34 vias
v2: diameter 0.4, hole 0.2, Top Layer to Bottom Layer, 24 vias
v3: diameter 0.4, hole 0.2, Top Layer to Bottom Layer, tented both sides, 20 vias
v4: diameter 0.6, hole 0.3, Top Layer to Bottom Layer, tented both sides, 1 vias

## Nets (pads, with @x,y where several pads share a name; then routed paths per layer and width w, separated by ;. In a path a pad name is that pad's centre, name@x,y a point inside that pad or via, vN(x,y) a via of type N, cw(c..) or ccw(c..) an arc to the next point about the centre after c; other vN are vias at no path point)
5V: "Header Direito.4" "Header Direito.5" "Header Esquerdo.6" "Header Esquerdo.7" C2.2 C3.2 C5.1 C15.2 C17.1 C18.2 C20.2 J1.PIN1 J2.VCC J3.PIN1 J4.PIN1 J5.PIN1 J6.PIN1 J7.PIN1 J9.PIN3 J12.PIN1 J13.PIN1 R2.2 U1.3 U2.3 U3.3 | length 66.3
  Top Layer w1: J1.PIN1@36.322,49.733 ccw(c36.322,47.461) 34.05,47.461 34.05,41.454 34.636,40.869 36.726,40.869 ; v1(69.725,36.175) 78.9,36.175 79.525,36.8 85.873,36.8 J2.VCC@86.081,37.008 86.081,38.557 cw(c88.621,38.557) 88.621,41.097 96.444,41.097 99.035,41.097 ; 99.085,41.097 ccw(c99.085,43.637) 99.181,41.099 ; v1(100.711,53.543) 101.625,52.629 101.625,43.637 cw(c99.085,43.637) 99.181,41.099 ; R2.2@101.092,35.315 101.092,39.188 ccw(c99.181,39.188) 99.181,41.099
  other v1: 71.575,34.775 69.675,34.85 71.6,36.175 100.95,40.4 98.882,52.273 100.711,52.273 98.882,53.543
ANALOG1: J12.PIN3 R12.2 | length 2
  Top Layer w0.254: R12.2@47.975,48.051 J12.PIN3@47.975,50.085
ANALOG2: J13.PIN3 R14.2 | length 2.1
  Top Layer w0.254: R14.2@44.925,48.025 44.925,49.985 cw(c45.025,49.985) J13.PIN3@45.025,50.085
AnalogSignal1: IC1.8 R14.1 R15.2 | length 15.9
  Top Layer w0.254: R14.1@44.925,46.725 44.925,46.063 45.331,45.656 46.977,44.011 46.977,43.302 49.028,41.25 IC1.8@57.75,41.25
AnalogSignal2: IC1.11 R12.1 R13.2 | length 15.8
  Top Layer w0.254: R13.2@47.777,45.052 R13.2@48.1,45.375 ; R12.1@48.025,46.85 R12.1@48.1,46.85 ; 48.45,46.1 49.2,45.35 v2(49.2,41.9) ; v2(49.2,39.9) 49.24,39.9 49.359,40.019 56.152,40.019 56.414,39.757 57.743,39.757 IC1.11@57.75,39.75
  Bottom Layer w0.254: v2(49.2,39.9) v2(49.2,41.9)
BAT: "Header Direito.9" "Header Direito.10" "Header Esquerdo.1" "Header Esquerdo.2" J11.PIN1 Q1.S R9.1 R10.2 | length 96.1
  Top Layer w1: 96.444,43.87 96.706,43.87 96.804,43.967 v1(98.45,43.967)
  Bottom Layer w1: v1(36.025,42.35) 36.576,41.799 36.576,33.706 36.805,33.477 36.805,28.35 ccw(c39.027,28.35) 39.027,26.127 95.96,26.127 ccw(c95.96,28.618) 98.45,28.618 v1(98.45,43.967)
  other v1: 36.664,43.514 35.35,43.525 100.178,43.967
BLUETOOTHRX: IC1.42 J2.RX | length 26.6
  Top Layer w0.254: IC1.42@69.25,41.75 81.925,41.75 v3(82.7,40.975) ; v3(82.694,35.846) 83.075,35.465 83.075,32.9 85.661,30.314 85.661,30.242 86.081,29.822 J2.RX@86.081,29.388
  Bottom Layer w0.254: v3@82.7,35.975 v3(82.7,40.975)
BLUETOOTHTX: IC1.43 J2.TX | length 25
  Top Layer w0.254: IC1.43@69.25,42.25 82.35,42.25 v3(83.625,40.975) ; v3(83.65,35.846) 83.65,34.531 86.081,32.101 J2.TX@86.081,31.928
  Bottom Layer w0.254: v3(83.625,40.975) 83.637,40.963 83.637,35.859 v3(83.65,35.846)
BOOT: IC1.60 R6.1 | length 7.8
  Top Layer w0.254: R6.1@55.506,49.234 55.513,49.227 55.773,49.227 55.773,49.105 55.922,48.956 59.324,48.956 60.349,47.931 61.289,47.931 61.727,47.493 61.727,46.773 IC1.60@61.75,46.75
DIST1: IC1.55 J3.PIN3 | length 8.7
  Top Layer w0.254: J3.PIN3@57.404,50.267 58.572,50.267 60.452,48.387 63.166,48.387 cw(c63.166,48.133) 63.345,48.314 64.153,47.505 cw(c63.973,47.326) IC1.55@64.227,47.327 ; IC1.55@64.227,47.326 64.227,46.773 IC1.55@64.25,46.75
DIST2: IC1.54 J4.PIN3 | length 6.4
  Top Layer w0.254: J4.PIN3@60.452,50.267 61.938,48.781 63.868,48.781 64.727,47.922 64.727,46.773 IC1.54@64.75,46.75
DIST3: IC1.53 J5.PIN3 | length 4
  Top Layer w0.254: J5.PIN3@63.5,50.267 63.5,50.056 65.25,48.306 IC1.53@65.25,46.998
DIST4: IC1.52 J6.PIN3 | length 3.8
  Top Layer w0.254: IC1.52@65.75,46.75 65.758,46.758 65.758,49.068 66.548,49.858 J6.PIN3@66.548,50.267
DIST5: IC1.51 J7.PIN3 | length 4.8
  Top Layer w0.254: IC1.51@66.243,47.244 66.243,47.593 68.61,49.96 69.289,49.96 J7.PIN3@69.596,50.267
FLAGSIGNAL: IC1.17 J9.PIN1 | length 31.2
  Top Layer w0.254: v3(50.65,31.575) 50.662,31.587 50.662,36.907 v2(50.675,36.919) ; v2(50.7,44.925) 50.7,49.91 J9.PIN1@50.85,50.06 ; v3(53.05,29.175) 53.05,29.203 59.097,35.25 IC1.17@59.75,35.25
  Bottom Layer w0.254: v3(50.65,31.575) v3(53.05,29.175) ; v2(50.675,36.919) 50.688,36.932 50.688,44.913 v2(50.7,44.925)
LED1: IC1.33 R3.2 | length 15.8
  Top Layer w0.254: IC1.33@69.25,37.25 69.7,37.25 69.821,37.129 v3(78.4,37.129) ; R3.2@74.725,32.875 75.073,33.223 75.855,33.223 77.844,35.212 78.416,35.212 v3(78.425,35.221)
  Bottom Layer w0.254: v3(78.4,37.129) 78.413,37.117 78.413,35.233 v3(78.425,35.221)
LED2: IC1.34 R4.2 | length 16.8
  Top Layer w0.254: IC1.34@69.25,37.75 79.49,37.75 79.564,37.824 v3(79.604,37.824) ; R4.2@77.275,32.825 77.623,33.173 77.898,33.173 79.92,35.195 v3(79.92,35.846)
  Bottom Layer w0.254: v3(79.604,37.824) 79.604,37.806 79.92,37.49 v3(79.92,35.846)
LED3: IC1.35 R5.2 | length 17.4
  Top Layer w0.254: IC1.35@69.25,38.25 75.174,38.25 75.328,38.405 80.222,38.405 80.825,37.802 v3(80.825,37.775) ; R5.2@79.841,32.684 80.781,33.624 v3(80.781,35.846)
  Bottom Layer w0.254: v3(80.781,35.846) 80.803,35.868 80.803,37.753 v3(80.825,37.775)
LED4: IC1.36 R7.2 | length 18
  Top Layer w0.254: IC1.36@69.503,38.75 75.173,38.75 75.229,38.806 80.819,38.806 v3(81.725,37.9) ; v3@81.725,35.803 81.725,33 R7.2@82.05,32.675
  Bottom Layer w0.254: v3@81.725,35.8 v3(81.725,37.9)
  other v3: 81.725,35.825
M1_Aux: "Header Esquerdo.3" IC1.10 | length 19.3
  Top Layer w0.254: 39.522,42.87 40.823,42.87 43.187,40.506 56.192,40.506 56.432,40.266 57.734,40.266 IC1.10@57.75,40.25
M1DIR: "Header Esquerdo.5" IC1.15 | length 20.3
  Top Layer w0.254: 39.392,41.885 40.411,41.885 44.796,37.5 55.925,37.5 56.175,37.75 IC1.15@57.75,37.75
M1PWM: "Header Esquerdo.4" IC1.14 | length 20.1
  Top Layer w0.254: 39.665,42.393 40.615,42.393 45.082,37.925 55.75,37.925 56.052,38.227 57.727,38.227 IC1.14@57.75,38.25
M2_Aux: "Header Direito.8" IC1.44 | length 27.2
  Top Layer w0.254: IC1.44@69.25,42.75 70.275,42.75 70.395,42.87 96.444,42.87
M2DIR: "Header Direito.6" IC1.38 | length 28.1
  Top Layer w0.254: IC1.38@69.25,39.75 84.784,39.75 86.904,41.87 96.444,41.87
M2PWM: "Header Direito.7" IC1.39 | length 28.1
  Top Layer w0.254: IC1.39@69.25,40.25 84.624,40.25 86.744,42.37 96.444,42.37
MedidorBateria: C16.2 IC1.9 R10.1 R11.2 | length 22.9
  Top Layer w0.254: v3(36.551,44.766) 40.309,44.766 44.215,40.86 56.338,40.86 56.448,40.75 IC1.9@57.75,40.75
NetC1_2: C1.2 C19.2 Q1.D U1.1 U3.1
  other v1: 76.048,44.171 78.498,44.171 80.949,44.171 83.4,44.171 76.048,45.949 78.498,45.949 80.949,45.949 83.4,45.949
NetD1_C: D1.C R3.1
NetD2_C: D2.C R4.1
NetD3_C: D3.C R5.1
NetD4_C: D4.C R7.1
NetD5_A: D5.A R1.1
NetD6_A: D6.A R2.1
NetQ1_G: Q1.G R8.2 R9.2
NetR8_1: R8.1 S1.A1
POS1: IC1.24 J10.PIN2 | length 9
  Top Layer w0.254: IC1.24@63.25,35.25 63.25,31.695 J10.PIN2@67.081,27.864
POS2: IC1.23 J10.PIN3 | length 8.1
  Top Layer w0.254: IC1.23@62.75,35.25 62.75,29.655 J10.PIN3@64.541,27.864
POS3: IC1.22 J10.PIN4 | length 7.5
  Top Layer w0.254: J10.PIN4@62.001,27.864 62.227,28.089 62.227,35.227 IC1.22@62.25,35.25
POS4: IC1.21 J10.PIN5 | length 8.3
  Top Layer w0.254: J10.PIN5@59.461,27.864 61.75,30.152 IC1.21@61.75,35.25
POS5: IC1.20 J10.PIN6 | length 9.2
  Top Layer w0.254: J10.PIN6@56.921,27.864 61.25,32.192 IC1.20@61.25,35.25
RESET: IC1.7 J8.RESET | length 22.1
  Top Layer w0.254: J8.RESET@45.999,29.134 49.975,33.109 v2(49.975,36.875) ; v2(50.025,41.831) 50.065,41.831 50.146,41.75 IC1.7@57.75,41.75
  Bottom Layer w0.254: v2(49.975,36.875) 49.981,36.881 49.981,40.682 49.975,40.688 49.975,41.678 49.997,41.7 49.997,41.803 v2(50.025,41.831)
START: IC1.16 J1.PIN3 | length 24.7
  Top Layer w0.254: J1.PIN3@41.78,49.775 43.725,47.83 v2(43.725,47.825) ; v2(50.025,44) 51.397,42.628 51.397,42.509 v2(51.425,42.481) ; v2(51.45,36.919) 55.982,36.919 56.313,37.25 IC1.16@57.75,37.25
  Bottom Layer w0.254: v2(43.725,47.825) 46.2,47.825 v2(50.025,44) ; v2(51.425,42.481) 51.438,42.468 51.438,36.932 v2(51.45,36.919)
SWCLK: IC1.49 J8.CLK | length 26.9
  Top Layer w0.254: J8.CLK@48.539,29.134 50.14,30.734 52.769,30.734 v3(66.129,44.094) ; v3(67.25,45.9) IC1.49@67.25,46.75
  Bottom Layer w0.254: v3(66.129,44.094) 67.222,45.187 67.222,45.872 v3(67.25,45.9)
SWDIO: IC1.46 J8.DIO | length 24.2
  Top Layer w0.254: J8.DIO@51.079,29.134 52.326,30.38 53.237,30.38 v3(66.326,43.469) ; v3(68.35,43.775) 68.363,43.762 69.237,43.762 IC1.46@69.25,43.75
  Bottom Layer w0.254: v3(66.326,43.469) 66.365,43.469 66.671,43.775 v3(68.35,43.775)
"VCAP 1": C6.1 IC1.31 | length 2.9
  Top Layer w0.254: C6.1@64.967,33.5 65.34,33.873 66.073,33.873 66.727,34.527 66.727,35.227 IC1.31@66.75,35.25
"VCAP 2": C10.1 IC1.47 | length 2.4
  Top Layer w0.254: IC1.47@69.25,44.25 70.913,44.25 71.311,44.648 C10.1@71.311,44.848
VDD: C4.2 C7.2 C8.2 C9.2 C11.2 C12.2 C13.2 C14.2 D1.A D2.A D3.A D4.A IC1.1 IC1.13 IC1.19 IC1.32 IC1.48 IC1.64 J8.VCC J10.PIN1 R1.2 U2.2 | length 69.1
  Top Layer w0.254: J8.VCC@43.459,29.134 44.77,27.823 55.122,27.823 58.784,31.485 58.858,31.485 59.231,31.858 59.231,32.258 59.604,32.631 60.733,33.76 60.733,35.233 IC1.19@60.75,35.25 60.773,35.273 60.773,35.906 61.697,36.83 66.599,36.83 67.25,36.179 ; C13.2@55.016,39.072 55.016,38.971 55.173,38.814 55.274,38.814 55.339,38.75 IC1.13@57.75,38.75 59.172,38.75 60.046,39.624 60.046,43.409 61.362,44.725 ; C13.2@55.028,39.011 C13.2@55.282,39.011 ; C11.2@56.146,46.906 56.519,46.939 59.727,46.939 59.75,46.916 IC1.64@59.75,46.75 ; IC1.1@57.352,44.773 57.375,44.75 IC1.1@57.75,44.75 ; 59.182,45.288 59.681,45.288 60.011,44.958 61.595,44.958 61.362,44.725 ; IC1.32@67.25,35.25 67.25,36.179 ; 67.276,44.669 67.25,44.577 67.25,36.179 ; 67.276,44.725 61.362,44.725 ; 67.276,44.75 IC1.48@69.25,44.75 69.7,44.75 69.723,44.773 69.723,44.878 70.899,46.054 70.899,46.744 C8.2@71.272,47.117
  other v1: 93.081,28.448 94.369,29.489 93.081,30.531 95.656,30.531
  other v4: 95.656,28.448
VSS: "Header Direito.1" "Header Direito.2" "Header Direito.3" "Header Esquerdo.8" "Header Esquerdo.9" "Header Esquerdo.10" C1.1 C2.1 C3.1 C4.1 C5.2 C6.2 C7.1 C8.1 C9.1 C10.2 C11.1 C12.1 C13.1 C14.1 C15.1 C16.1 C17.2 C18.1 C19.1 C20.1 D5.C D6.C IC1.12 IC1.18 IC1.63 J1.PIN2 J2.GND J3.PIN2 J4.PIN2 J5.PIN2 J6.PIN2 J7.PIN2 J8.GND J9.PIN2 J11.PIN2 J12.PIN2 J13.PIN2 R6.2 R11.1 R13.1 R15.1 S1.A2 U1.2 U2.1 U3.2 | length 20
  Top Layer w0.254: v2(45,43.175) R15.1@45,44.1 ; v2(48.1,43.15) R13.1@48.1,44.075 ; v2(52.375,39.05) 53.267,39.05 cw(c53.267,38.992) C13.1@53.325,38.992 ; 53.975,48.489 59.131,48.489 60.227,47.393 60.227,46.773 IC1.63@60.25,46.75 ; v3(55.739,29.777) 55.767,29.805 55.767,30.094 57.531,31.858 C7.1@57.531,32.058 57.531,32.258 58.59,33.317 59.072,33.317 60.25,34.494 IC1.18@60.25,35.25 ; v2(56.019,39.331) 56.099,39.25 IC1.12@57.75,39.25 ; C6.2@64.967,31.8 cw(c65.233,31.8) C6.2@65.233,32.066 ; C14.1@67.696,31.237 C14.1@67.708,31.225
  other v1: 100.901,29.412 67.225,29.775 41.25,33.625 41.25,35.183 41.25,36.742 41.25,38.3 94.64,38.735 94.64,39.751
  other v2: 45.39,38.608 47.771,38.608 44.78,39.925 47.955,39.925 46.393,41.441 47.981,41.441 44.069,41.935 42.088,43.917 38.506,45.364 39.98,45.364
pads on no net: "Header Direito.MP1" "Header Direito.MP2" "Header Esquerdo.MP1" "Header Esquerdo.MP2" IC1.2 IC1.3 IC1.4 IC1.5 IC1.6 IC1.25 IC1.26 IC1.27 IC1.28 IC1.29 IC1.30 IC1.37 IC1.40 IC1.41 IC1.45 IC1.50 IC1.56 IC1.57 IC1.58 IC1.59 IC1.61 IC1.62 S1.A3

## Polygon pours and split planes (outlines as drawn)
VSS on Top Layer "VSS_L01_P350" (solid, pour order 350): 41.649,39.635 44.348,36.906 41.123,36.932 40.462,37.592
BAT on Top Layer "BAT_L01_P348" (solid, pour order 348): 91.364,53.721 cw(c90.805,53.721) 90.805,53.162 90.424,53.162 ccw(c90.424,52.73) 89.992,52.73 89.992,48.387 ccw(c90.627,48.387) 90.627,47.752 93.523,47.752 cw(c93.523,47.371) 93.904,47.371 93.904,43.84 ccw(c94.513,43.84) 94.513,43.231 99.924,43.231 ccw(c99.924,43.993) 100.686,43.993 100.686,49.733 ccw(c99.644,49.733) 99.644,50.775 98.323,50.775 cw(c98.323,51.968) 97.13,51.968 97.13,55.474 ccw(c95.885,55.474) 95.885,56.718 91.948,56.718 ccw(c91.948,56.134) 91.364,56.134
5V on Top Layer "5V_L01_P346" (solid, pour order 346): 101.117,50.114 101.117,50.368 ccw(c100.279,50.368) 100.279,51.206 98.577,51.206 cw(c98.577,51.994) 97.79,51.994 97.79,56.159 cw(c98.222,56.159) 98.222,56.591 101.625,56.591 cw(c101.625,56.134) 102.083,56.134 102.083,51.206 cw(c101.651,51.206) 101.651,50.775
5V on Top Layer "5V_L01_P342" (solid, pour order 342): 98.525,56.6 101.725,56.6 cw(c101.725,56.192) 102.133,56.192 102.133,50.47 100.325,52.15 98.525,52.85 98,55.325
5V on Top Layer "5V_L01_P341" (solid, pour order 341): 38.35,56.85 33.95,56.85 ccw(c33.95,56.475) 33.575,56.475 33.575,52.616 36.691,52.616 ccw(c36.691,53.025) 37.1,53.025
VSS on Top Layer "VSS_L01_P340" (solid, pour order 340): 37.883,25.788 34.412,25.788 cw(c34.412,26.6) 33.6,26.6 33.6,30.6 37.625,30.6 cw(c37.625,30.225) 38,30.225
VSS on Top Layer "VSS_L01_P338" (solid, pour order 338): 97.669,29.303 97.669,26.231 ccw(c98.075,26.231) 98.075,25.825 101.557,25.825 ccw(c101.557,26.3) 102.032,26.3 102.032,29.134
VSS on Top Layer "VSS_L01_P337" (solid, pour order 337): 41.841,39.003 ccw(c43.919,39.003) 43.919,36.925 48.65,36.925 cw(c48.65,36.15) 49.425,36.15 49.425,33.325 46.7,30.6 42.975,30.6 ccw(c42.975,29.8) 42.175,29.8 42.175,27.825 ccw(c42.85,27.825) 42.85,27.15 55.2,27.15 cw(c55.2,26.675) 55.675,26.675 55.675,25.975 cw(c55.425,25.975) 55.425,25.725 38.275,25.725 cw(c38.275,26.925) 37.075,26.925 37.075,27.53 ccw(c36.352,27.53) 36.352,28.253 36.352,29.01 cw(c38.892,29.01) 38.892,31.55 39.25,31.55
VDD on Top Layer "VDD_L01_P335" (solid, pour order 335): 59.9,46.475 59.9,46 ccw(c60.275,46) 60.275,45.625 68.55,45.625 ccw(c68.55,46.1) 69.025,46.1 69.025,47.45 cw(c69.425,47.45) 69.425,47.85 71.725,47.85 cw(c71.725,47.675) 71.9,47.675 71.9,46.25 cw(c71.625,46.25) 71.625,45.975 71,45.975 70.1,45.075 59.55,45.075 59,45.625
VSS on Top Layer "VSS_L01_P334" (solid, pour order 334): 54.65,49.25 54.65,49.075 ccw(c55.1,49.075) 55.1,48.625 55.1,48.35 ccw(c55.1,47.9) 54.65,47.9 54.65,47.85 cw(c54.65,48.45) 54.05,48.45 54.05,49.05
VSS on Top Layer "VSS_L01_P333" (solid, pour order 333): 50.725,51.675 51.95,51.675 cw(c51.95,50.425) 53.2,50.425 53.2,42.575 ccw(c53.55,42.575) 53.55,42.225 54.375,42.225 ccw(c54.375,42.5) 54.65,42.5 54.65,50.345 cw(c55.969,50.345) 55.969,51.664 55.969,51.831 ccw(c54.9,51.831) 54.9,52.9
AnalogSignal1 on Top Layer "ANALOGSIGNAL1_L01_P332" (solid, pour order 332): 44.175,47.15 cw(c44.4,47.15) 44.4,47.375 45.425,47.375 cw(c45.425,47.175) 45.625,47.175 45.625,44.925 cw(c45.45,44.925) 45.45,44.75 44.425,44.75 cw(c44.425,45) 44.175,45
AnalogSignal2 on Top Layer "ANALOGSIGNAL2_L01_P331" (solid, pour order 331): 47.5,45.025 ccw(c47.675,45.025) 47.675,44.85 48.6,44.85 ccw(c48.6,44.975) 48.725,44.975 48.725,47.3 ccw(c48.575,47.3) 48.575,47.45 47.65,47.45 ccw(c47.65,47.3) 47.5,47.3
NetD4_C on Top Layer "NETD4_C_L01_P327" (solid, pour order 327): 81.15,28.925 ccw(c81.475,28.925) 81.475,28.6 83.125,28.6 ccw(c83.125,28.925) 83.45,28.925 83.45,31.45 ccw(c83.138,31.438) 83.125,31.75 81.45,31.75 ccw(c81.45,31.45) 81.15,31.45
NetD3_C on Top Layer "NETD3_C_L01_P326" (solid, pour order 326): 78.675,28.925 ccw(c79,28.925) 79,28.6 80.65,28.6 ccw(c80.65,28.925) 80.975,28.925 80.975,31.45 ccw(c80.663,31.438) 80.65,31.75 78.975,31.75 ccw(c78.975,31.45) 78.675,31.45
NetD2_C on Top Layer "NETD2_C_L01_P325" (solid, pour order 325): 76.2,28.925 ccw(c76.525,28.925) 76.525,28.6 78.175,28.6 ccw(c78.175,28.925) 78.5,28.925 78.5,31.45 ccw(c78.188,31.438) 78.175,31.75 76.5,31.75 ccw(c76.5,31.45) 76.2,31.45
NetD1_C on Top Layer "NETD1_C_L01_P324" (solid, pour order 324): 73.575,28.925 ccw(c73.9,28.925) 73.9,28.6 75.55,28.6 ccw(c75.55,28.925) 75.875,28.925 75.875,31.45 ccw(c75.563,31.438) 75.55,31.75 73.875,31.75 ccw(c73.875,31.45) 73.575,31.45
5V on Top Layer "5V_L01_P321" (solid, pour order 321): 71.985,34.1 76.15,34.1 77.75,35.7 78.25,35.7 77.775,36.175 72.506,36.175
VDD on Top Layer "VDD_L01_P312" (solid, pour order 312): 67.425,36.05 67.425,35.15 ccw(c68.875,35.2) 68.925,33.75 72.525,33.75 cw(c72.525,33.1) 73.175,33.1 73.175,29.325 ccw(c74.85,29.325) 74.85,27.65 87.325,27.65 ccw(c87.325,28.325) 88,28.325 88,31.4 cw(c88.9,31.4) 88.9,32.3 96.025,32.3 cw(c96.025,31.325) 97,31.325 97,26.425 cw(c96.25,26.425) 96.25,25.675 69.775,25.675 cw(c69.775,26.75) 68.7,26.75 68.7,31.775 ccw(c68.3,31.775) 68.3,32.175 67.35,32.175 cw(c67.388,32.513) 67.05,32.55 67.05,35.85
VSS on Top Layer "VSS_L01_P279" (solid, pour order 279): 96.368,33.426 cw(c96.368,32.156) 97.638,32.156 97.638,29.54 ccw(c98.45,29.54) 98.45,28.727 101.524,28.727 ccw(c101.524,29.235) 102.032,29.235 102.032,30.353 ccw(c101.651,30.378) 101.676,30.759 100.243,30.759 cw(c100.243,31.825) 99.177,31.825 99.177,34.477 ccw(c98.463,34.617) 98.603,35.331 98.323,35.331 cw(c98.323,36.271) 97.384,36.271 96.164,36.271 ccw(c96.164,35.941) 95.834,35.941
NetD6_A on Top Layer "NETD6_A_L01_P278" (solid, pour order 278): 102.006,33.782 ccw(c101.727,33.782) 101.727,34.061 100.178,34.061 ccw(c100.114,33.719) 99.771,33.782 99.771,31.7 ccw(c100.382,31.7) 100.382,31.09 101.549,31.09 ccw(c101.549,31.547) 102.006,31.547
VSS on Top Layer "VSS_L01_P323" (solid, pour order 323): 94.374,40.326 ccw(c94.374,37.803) 91.85,37.803 91.85,37.375 cw(c90.45,37.375) 90.45,35.975 ccw(c91.325,35.975) 91.325,35.1 94.95,35.1
BAT on Top Layer "BAT_L01_P320" (solid, pour order 320): 36.25,44.2 35.075,44.2 ccw(c35.075,43.85) 34.725,43.85 34.725,42.225 ccw(c35.15,42.225) 35.15,41.8 37.85,41.8 ccw(c37.85,42.3) 38.35,42.3 38.35,42.375 cw(c39.2,42.375) 39.2,43.225 40.025,43.225 ccw(c40.025,43.4) 40.2,43.4 40.2,44.007 ccw(c40,44) 39.992,44.2
VDD on Top Layer "VDD_L01_P313" (solid, pour order 313): 67.83,43.85 67.83,43.631 ccw(c68.094,43.64) 68.102,43.377 68.151,43.375 cw(c68.119,43.126) 68.368,43.094 68.368,34.279 67.294,33.956 cw(c67.294,34.2) 67.05,34.2 67.05,35.85 ccw(c66.675,35.85) 66.675,36.225 61.375,36.225 ccw(c61.375,35.75) 60.9,35.75 60.6,35.75 cw(c60.6,35.775) 60.575,35.775 60.575,37.025 66.75,43.275 ccw(c66.75,43.475) 66.95,43.475 66.95,44.05 ccw(c66.4,44.05) 66.4,44.6 67.207,44.6 ccw(c67.785,44.645) 67.83,44.067